# Altium PCB 2MB_RAM_CARD.pcbdoc (part 1 of 2)
Units mil, origin at the board's own origin, x right, y up, seen from the top; angles counter-clockwise.
Board outline 12033.6 x 7458.81 mil, 2 copper layers (Top Layer, Bottom Layer); 77 components, 241 nets, 875 pads, 126 vias.
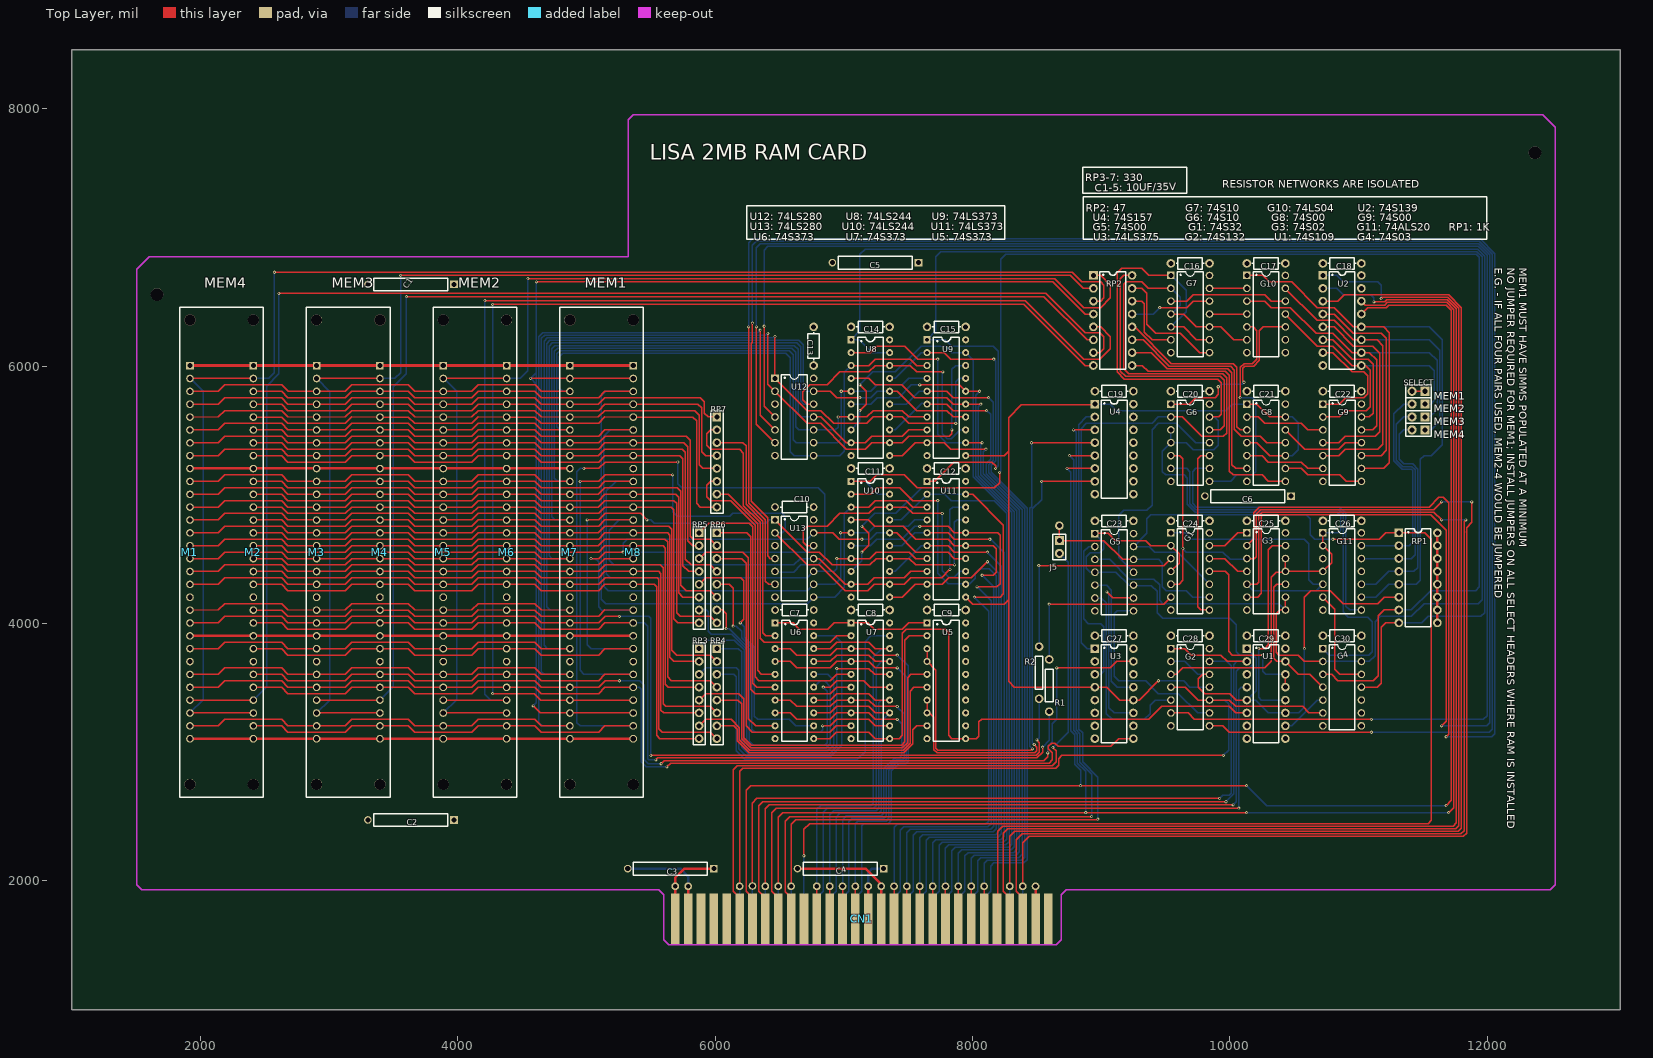
[diagram p0: Top Layer view]
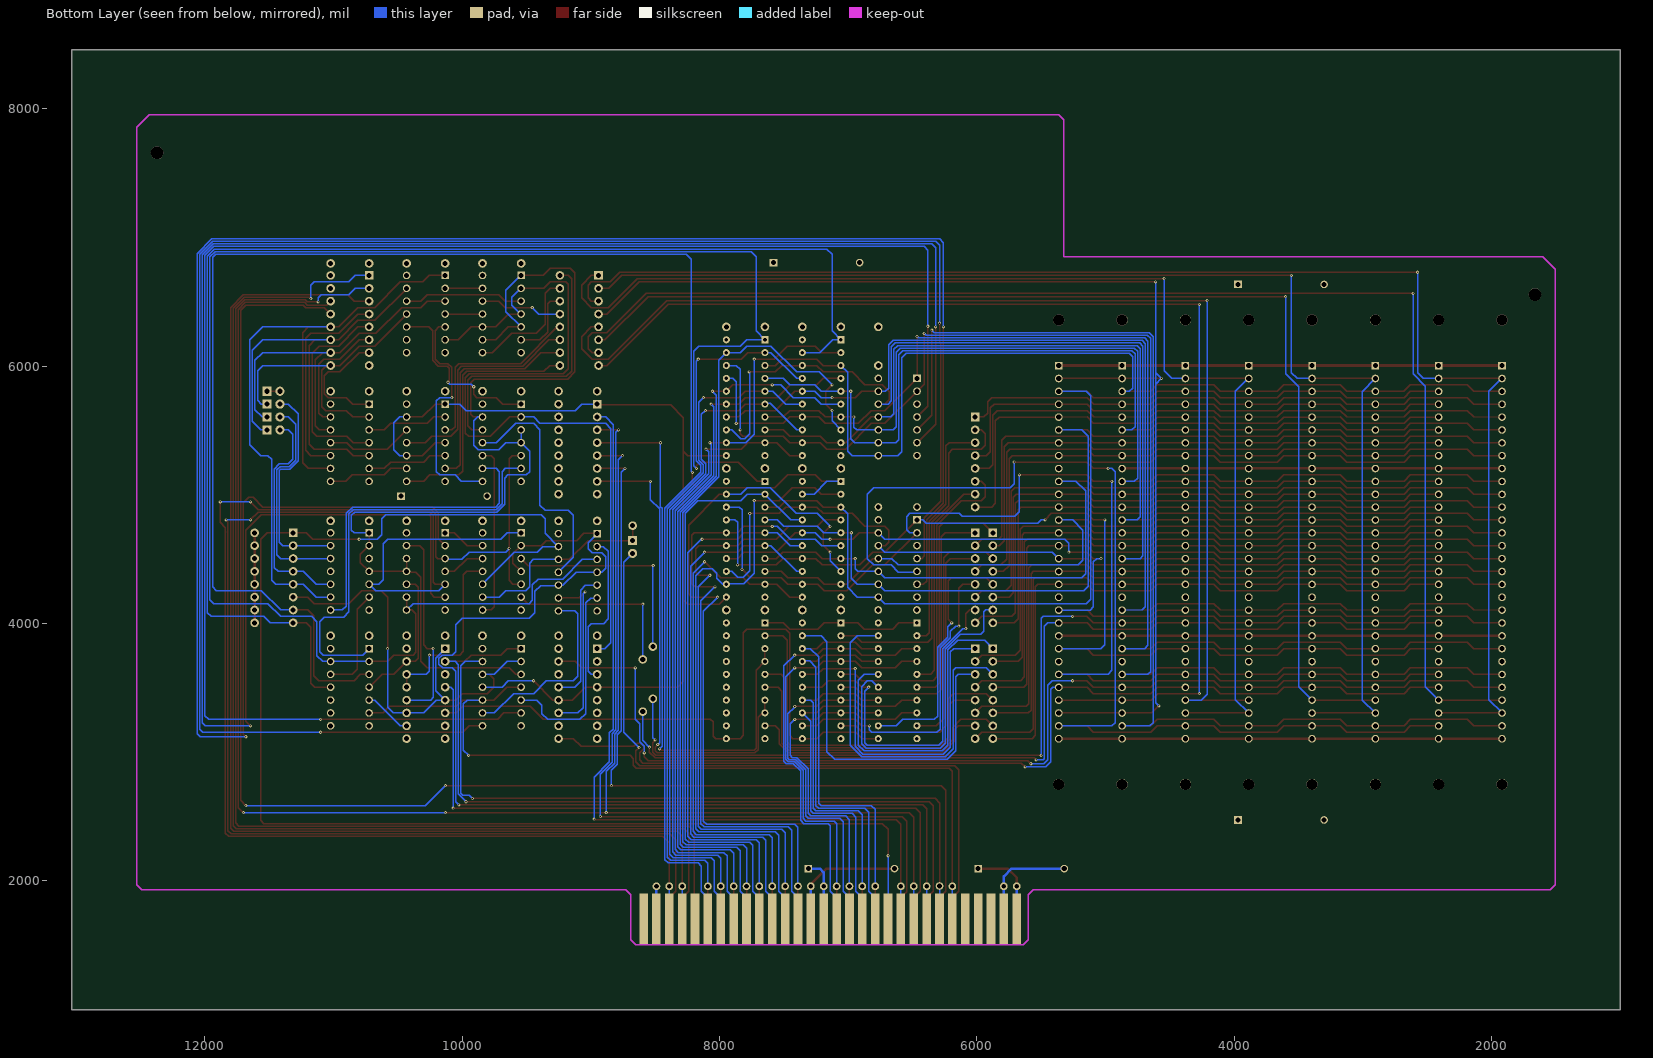
[diagram p1: Bottom Layer view, seen from below]

## Layer stack, top to bottom
Top Layer: signal copper (thickness not stored)
Dielectric: dielectric 12.6, FR-4, Dk 4.8
Bottom Layer: signal copper (thickness not stored)

## Board outline
13033.6,1000 1000,1000 1000,8458.81 13033.6,8458.81

## Components (designator, comment, footprint, x,y, rotation, side; value= is the part's Value field where it differs from the comment)
C1 "10uF" 17MM_NARROW_AXIAL_CAP 3970,6635.19 r180 top
C2 "10uF" 17MM_NARROW_AXIAL_CAP 3970,2473.47 r180 top
C3 "10uF" 17MM_NARROW_AXIAL_CAP 5989.99,2095.2 r180 top
C4 "10uF" 17MM_NARROW_AXIAL_CAP 7309.28,2095.2 r180 top
C5 "10uF" 17MM_NARROW_AXIAL_CAP 7579.99,6805.19 r180 top
C6 "10uF" 17MM_NARROW_AXIAL_CAP 10475,4990.19 r180 top
C7 "100nF" CERAMIC_CAP_LISA#1 6465.62,4105.19 r0 top
C8 "100nF" CERAMIC_CAP_LISA#2 7056.17,4105.19 r0 top
C9 "100nF" CERAMIC_CAP_LISA#2 7646.72,4105.19 r0 top
C10 "100nF" CERAMIC_CAP_LISA#1 6464.99,4905.19 r0 top
C11 "100nF" CERAMIC_CAP_LISA#2 7056.21,5205.19 r0 top
C12 "100nF" CERAMIC_CAP_LISA#2 7646.72,5205.19 r0 top
C13 "100nF" CERAMIC_CAP_LISA#2 6765,6305.19 r270 top
C14 "100nF" CERAMIC_CAP_LISA#2 7056.21,6305.19 r0 top
C15 "100nF" CERAMIC_CAP_LISA#2 7646.72,6305.19 r0 top
C16 "100nF" CERAMIC_CAP_LISA#2 9541.83,6798.3 r0 top
C17 "100nF" CERAMIC_CAP_LISA#2 10131.79,6798.3 r0 top
C18 "100nF" CERAMIC_CAP_LISA#2 10722.3,6798.3 r0 top
C19 "100nF" CERAMIC_CAP_LISA#2 8950.69,5805.23 r0 top
C20 "100nF" CERAMIC_CAP_LISA#2 9541.83,5805.23 r0 top
C21 "100nF" CERAMIC_CAP_LISA#2 10131.79,5805.23 r0 top
C22 "100nF" CERAMIC_CAP_LISA#2 10722.3,5805.23 r0 top
C23 "100nF" CERAMIC_CAP_LISA#2 8950.69,4798.3 r0 top
C24 "100nF" CERAMIC_CAP_LISA#2 9541.83,4798.3 r0 top
C25 "100nF" CERAMIC_CAP_LISA#2 10131.79,4798.3 r0 top
C26 "100nF" CERAMIC_CAP_LISA#2 10722.3,4798.3 r0 top
C27 "100nF" CERAMIC_CAP_LISA#2 8950.69,3905.24 r0 top
C28 "100nF" CERAMIC_CAP_LISA#2 9541.83,3905.24 r0 top
C29 "100nF" CERAMIC_CAP_LISA#2 10131.79,3905.24 r0 top
C30 "100nF" CERAMIC_CAP_LISA#2 10722.3,3905.24 r0 top
CN1 "EDGE CONNECTOR" "LISA RAM EDGE CONNECTOR" 7139.99,1705.19 r0 top
G1 "74S32 (LISA)" DIP-14_L19.4-W6.4-P2.54-LS7.6-BL 9691.2,4405.19 r270 top
G2 "74LS132 (LISA)" DIP-14_L19.2-W6.6-P2.54-LS10.9-BL 9691.8,3505.2 r270 top
G3 "74LS00 (LISA)" DIP14 10281.8,4412.1 r270 top
G4 "74LS03" DIP-14_L19.2-W6.6-P2.54-LS10.9-BL 10872.3,3505.2 r270 top
G5 "74LS00 (LISA)" DIP14 9100.7,4405.19 r270 top
G6 "74LS10 (LISA)" DIP14 9691.2,5412.1 r270 top
G7 "74LS10 (LISA)" DIP14 9691.2,6412.1 r270 top
G8 "74LS02 (LISA)" DIP-14_L19.4-W6.4-P2.54-LS7.6-BL 10281.8,5405.19 r270 top
G9 "74LS00" DIP14 10872.3,5412.1 r270 top
G10 "74LS04" DIP-14_L19.4-W6.4-P2.54-LS7.6-BL 10281.8,6405.19 r270 top
G11 "74ALS20" DIP-14_L19.4-W6.4-P2.54-LS7.6-BL 10872.3,4405.19 r270 top
J5 "JUMPER2" HDR-TH_2P-P2.54-V-M-1 8675,4595.19 r270 top
M1 "SIMM-30" SIMM30_NO_SILK 1918.4,4554.99 r0 top
M2 "SIMM-30" SIMM30_NO_SILK 2410.5,4554.99 r0 top
M3 "SIMM-30" SIMM30_NO_SILK 2902.6,4554.99 r0 top
M4 "SIMM-30" SIMM30_NO_SILK 3394.8,4554.99 r0 top
M5 "SIMM-30" SIMM30_NO_SILK 3886.9,4554.99 r0 top
M6 "SIMM-30" SIMM30_NO_SILK 4379,4554.99 r0 top
M7 "SIMM-30" SIMM30_NO_SILK 4871.1,4554.99 r0 top
M8 "SIMM-30" SIMM30_NO_SILK 5363.3,4554.99 r0 top
MEM1 "MEM1" HDR-TH_2P-P2.54-V-M-1 11466,5805.19 r180 top
MEM2 "MEM2" HDR-TH_2P-P2.54-V-M-1 11466,5705.19 r180 top
MEM3 "MEM3" HDR-TH_2P-P2.54-V-M-1 11466,5605.19 r180 top
MEM4 "MEM4" HDR-TH_2P-P2.54-V-M-1 11466,5505.19 r180 top
R1 "33" NARROW_RESISTOR 8517.55,3610.23 r180 top
R2 "33" NARROW_RESISTOR 8596.29,3510.23 r180 top
RP1 "1K RES_PACK" DIP-16_L19.7-W6.6-P2.54-LS7.6-BL 11462.91,4355.23 r270 top
RP2 "47OHM_RES_PACK" DIP-16_L19.7-W6.6-P2.54-LS7.6-BL 9090.01,6355.23 r270 top
RP3 "33 Ohm Resistor Network" RES_PACK_LINE 5875.11,3455.23 r270 top
RP4 "33 Ohm Resistor Network" RES_PACK_LINE 6012.91,3455.23 r270 top
RP5 "33 Ohm Resistor Network" RES_PACK_LINE 5875.11,4355.23 r270 top
RP6 "33 Ohm Resistor Network" RES_PACK_LINE 6012.91,4355.23 r270 top
RP7 "33 Ohm Resistor Network" RES_PACK_LINE 6012.91,5255.23 r270 top
U1 "74S109 (LISA)" DIP-16_L19.7-W6.6-P2.54-LS7.6-BL 10281.81,3455.23 r270 top
U2 "74LS139" DIP-16_L19.7-W6.6-P2.54-LS7.6-BL 10872.31,6355.23 r270 top
U3 "74LS375 (LISA)" DIP-16_L19.7-W6.6-P2.54-LS7.6-BL 9100.61,3455.23 r270 top
U4 "74LS157 (LISA)" DIP-16_L19.7-W6.6-P2.54-LS7.6-BL 9100.71,5355.23 r270 top
U5 "74LS373" DIP20_LISA 7796.7,3555.2 r270 top
U6 "74LS373" DIP20_LISA 6615.6,3555.2 r270 top
U7 "74LS373" DIP20_LISA 7206.2,3555.2 r270 top
U8 "74LS244" DIP20_LISA 7206.2,5755.19 r270 top
U9 "74LS373" DIP20_LISA 7796.7,5755.19 r270 top
U10 "74LS244" DIP20_LISA 7206.2,4655.19 r270 top
U11 "74LS373" DIP20_LISA 7796.7,4655.19 r270 top
U12 "74LS280" DIP-14_L19.4-W6.4-P2.54-LS7.6-BL 6615,5605.19 r270 top
U13 "74LS280" DIP-14_L19.4-W6.4-P2.54-LS7.6-BL 6615,4505.19 r270 top

## Footprints (in the part's own frame and the unit in brackets; to place one, negate y for a bottom-side part, rotate by r counter-clockwise, add the part's x,y. Pads: shape width x height; smd on the part's side, far side on the other; paste and mask are expansions set on the pad)
17MM_NARROW_AXIAL_CAP [mm]
  rect 1.5x1.5 hole 1 paste+0 mask+0.051: 1(0,0)
  round 1.5 hole 1 paste+0 mask+0.051: 2(17,0)
  silkscreen extent 1.27,-1.27 15.88,1.27
CERAMIC_CAP_LISA#1 [mil]
  round 60 hole 36 paste+0 mask+2: 1(0,0) 2(300,0)
  silkscreen extent 40,-45 260,45
CERAMIC_CAP_LISA#2 [mil]
  round 66.93 hole 39.37 paste+0 mask+2: 1(0,0) 2(300,0)
  silkscreen extent 40,-45 260,45
DIP14 [mm]
  rect 1.5x1.5 hole 1 paste+0 mask+0.051: 1(-7.445,-3.794)
  round 1.5 hole 1 paste+0 mask+0.051: 2(-4.905,-3.794) 3(-2.365,-3.794) 4(0.175,-3.794) 5(2.715,-3.794) 6(5.255,-3.794) 7(7.795,-3.794) 8(7.795,3.826) 9(5.255,3.826) 10(2.715,3.826) 11(0.175,3.826) 12(-2.365,3.826) 13(-4.905,3.826) 14(-7.445,3.826)
  silkscreen extent -8.21,-2.52 8.56,2.56
DIP20_LISA [mil]
  rect 55x55 hole 28 paste+0 mask+2: 1(-450,-150)
  round 55 hole 28 paste+0 mask+2: 2(-350,-150) 3(-250,-150) 4(-150,-150) 5(-50,-150) 6(50,-150) 7(150,-150) 8(250,-150) 9(350,-150) 10(450,-150) 11(450,150) 12(350,150) 13(250,150) 14(150,150) 15(50,150) 16(-50,150) 17(-150,150) 18(-250,150) 19(-350,150) 20(-450,150)
  silkscreen extent -470,-100 470,100
DIP-14_L19.2-W6.6-P2.54-LS10.9-BL [mm]
  rect 1.5x1.5 hole 1 paste+0 mask+0.051: 1(-7.62,-3.81)
  round 1.5 hole 1 paste+0 mask+0.051: 2(-5.08,-3.81) 3(-2.54,-3.81) 4(0,-3.81) 5(2.54,-3.81) 6(5.08,-3.81) 7(7.62,-3.81) 8(7.62,3.81) 9(5.08,3.81) 10(2.54,3.81) 11(0,3.81) 12(-2.54,3.81) 13(-5.08,3.81) 14(-7.62,3.81)
  silkscreen extent -8.38,-2.54 8.38,2.54
DIP-14_L19.4-W6.4-P2.54-LS7.6-BL [mm]
  rect 1.5x1.5 hole 1 paste+0 mask+0.051: 1(-7.62,-3.81)
  round 1.5 hole 1 paste+0 mask+0.051: 2(-5.08,-3.81) 3(-2.54,-3.81) 4(0,-3.81) 5(2.54,-3.81) 6(5.08,-3.81) 7(7.62,-3.81) 8(7.62,3.81) 9(5.08,3.81) 10(2.54,3.81) 11(0,3.81) 12(-2.54,3.81) 13(-5.08,3.81) 14(-7.62,3.81)
  silkscreen extent -8.38,-2.54 8.38,2.54
DIP-16_L19.7-W6.6-P2.54-LS7.6-BL [mm]
  rect 1.7x1.7 hole 1 paste+0 mask+0.051: 1(-8.89,-3.81)
  round 1.7 hole 1 paste+0 mask+0.051: 2(-6.35,-3.81) 3(-3.81,-3.81) 4(-1.27,-3.81) 5(1.27,-3.81) 6(3.81,-3.81) 7(6.35,-3.81) 8(8.89,-3.81) 9(8.89,3.81) 10(6.35,3.81) 11(3.81,3.81) 12(1.27,3.81) 13(-1.27,3.81) 14(-3.81,3.81) 15(-6.35,3.81) 16(-8.89,3.81)
  silkscreen extent -9.65,-2.54 9.65,2.54
HDR-TH_2P-P2.54-V-M-1 [mm]
  rect 1.8x1.8 hole 1 paste+0 mask+0.051: 1(-1.27,0)
  round 1.8 hole 1 paste+0 mask+0.051: 2(1.27,0)
  silkscreen extent -2.54,-1.27 2.54,1.27
"LISA RAM EDGE CONNECTOR" [mil]
  rect 66.93x390 smd far side paste+0 mask+2.01: 1(1450,0) 3(1350,0) 5(1250,0) 7(1150,0) 9(1050,0) 11(950,0) 13(850,0) 15(750,0) 17(650,0) 19(550,0) 21(450,0) 23(350,0) 25(250,0) 27(150,0) 29(50,0) 31(-50,0) 33(-150,0) 35(-250,0) 37(-350,0) 39(-450,0) 41(-550,0) 43(-650,0) 45(-750,0) 47(-850,0) 49(-950,0) 51(-1050,0) 53(-1150,0) 55(-1250,0) 57(-1350,0) 59(-1450,0)
  rect 66.93x390 smd paste+0 mask+2.01: 2(1450,0) 4(1350,0) 6(1250,0) 8(1150,0) 10(1050,0) 12(950,0) 14(850,0) 16(750,0) 18(650,0) 20(550,0) 22(450,0) 24(350,0) 26(250,0) 28(150,0) 30(50,0) 32(-50,0) 34(-150,0) 36(-250,0) 38(-350,0) 40(-450,0) 42(-550,0) 44(-650,0) 46(-750,0) 48(-850,0) 50(-950,0) 52(-1050,0) 54(-1150,0) 56(-1250,0) 58(-1350,0) 60(-1450,0)
NARROW_RESISTOR [mm]
  round 1.7 hole 1 paste+0 mask+0.051: 1(0,4.953) 2(0,-5.347)
  silkscreen extent -0.76,-3.43 0.76,3.05
RES_PACK_LINE [mm]
  rect 1.7x1.7 hole 1 paste+0 mask+0.051: 1(-8.89,0)
  round 1.7 hole 1 paste+0 mask+0.051: 2(-6.35,0) 3(-3.81,0) 4(-1.27,0) 5(1.27,0) 6(3.81,0) 7(6.35,0) 8(8.89,0)
  silkscreen extent -10.08,-1.18 10.11,1.23
SIMM30_NO_SILK [mm]
  rect 1.5x1.5 hole 1 paste+0 mask+0.051: 1(0,36.813)
  round 1.5 hole 1 paste+0 mask+0.051: 2(0,34.273) 3(0,31.733) 4(0,29.193) 5(0,26.653) 6(0,24.113) 7(0,21.573) 8(0,19.033) 9(0,16.493) 10(0,13.953) 11(0,11.413) 12(0,8.873) 13(0,6.333) 14(0,3.793) 15(0,1.253) 16(0,-1.287) 17(0,-3.827) 18(0,-6.367) 19(0,-8.907) 20(0,-11.447) 21(0,-13.987) 22(0,-16.527) 23(0,-19.067) 24(0,-21.607) 25(0,-24.147) 26(0,-26.687) 27(0,-29.227) 28(0,-31.767) 29(0,-34.307) 30(0,-36.847)
  round 2.2 hole 2.2 unplated paste+0: ""(0,-45.847) ""(0,45.813)

## Free pads (board coordinates)
  round 60 hole 36 paste+0 mask+2: 7(6290,1960.19) 9(6390,1957.75) 10(6490,1957.75) 11(6590,1957.75) 13(5689.99,1957.75) 13(5789.99,1957.75) 13(6790,1957.75) 13(7289.99,1957.75) 13(8489.99,1957.75) 14(6890,1957.75) 15(6990,1957.75) 16(7090,1957.75) 20(7390,1957.75) 21(7490,1957.75) 22(7590,1957.75) 26(7690,1957.75) 27(7790,1957.75) 28(7890,1957.75) 29(7990,1957.75) 30(8090,1957.75) 32(8290,1957.75) 33(8390,1957.75) 35(7189.99,1957.75) ""(6190,1957.75)
  round 66.93 hole 39.37 paste+0 mask+2: 34(8675,4760.19)
  round 98.43 hole 98.43 unplated paste+0: ""(1662.48,6556.16) ""(12371.12,7658.52)

## Via types
v1: diameter 24, hole 12, Top Layer to Bottom Layer, tented both sides, 126 vias

## Nets (pads, with @x,y where several pads share a name; then routed paths per layer and width w, separated by ;. In a path a pad name is that pad's centre, name@x,y a point inside that pad or via, vN(x,y) a via of type N, cw(c..) or ccw(c..) an arc to the next point about the centre after c; other vN are vias at no path point)
+5V: C1.1 C2.1 C3.1 C4.1 C5.1 C6.1 C7.2 C8.2 C9.2 C10.2 C11.2 C12.2 C13.2 C14.2 C15.2 C16.2 C17.2 C18.2 C19.2 C20.2 C21.2 C22.2 C23.2 C24.2 C25.2 C26.2 C27.2 C28.2 C29.2 C30.2 CN1.29 CN1.30 CN1.59 CN1.60 G1.14 G2.14 G3.14 G4.14 G5.14 G6.14 G7.14 G8.14 G9.14 G10.14 G11.14 M1.1 M1.30 M2.1 M2.30 M3.1 M3.30 M4.1 M4.30 M5.1 M5.30 M6.1 M6.30 M7.1 M7.30 M8.1 M8.30 pad.13@5689.99,1957.75 pad.35 RP1.9 RP1.10 RP1.11 RP1.12 RP1.13 RP1.14 RP1.15 RP1.16 U1.16 U2.16 U3.16 U4.16 U5.20 U6.20 U7.20 U8.20 U9.20 U10.20 U11.20 U12.14 U13.14 | length 9235.9
  Top Layer w19.68: M1.30@1918.4,3105.2 M8.30@5363.3,3105.2 ; M1.1@1918.4,6005.19 M8.1@5363.3,6005.19 ; CN1.60@5689.99,1705.19 pad.13@5689.99,1957.75 5689.99,2025.19 5760.34,2095.55 C3.1@5989.99,2095.2 ; CN1.30@7189.99,1705.19 pad.35@7189.99,1957.75 ; RP1.9@11612.91,4005.23 RP1.16@11612.91,4705.23
  Bottom Layer w19.68: CN1.59@5689.99,1705.19 pad.13@5689.99,1957.75 ; CN1.29@7189.99,1705.19 pad.35@7189.99,1957.75 7189.99,2065.18 7220,2095.2 C4.1@7309.28,2095.2
/CAS0: M7.2 M7.28 M8.2 M8.28 RP2.4 | length 9466
  Top Layer w10: v1(4565,5905.19) M7.2@4871.1,5904.99 ; v1(4585,3360.2) 4640,3305.2 M7.28@4871.1,3304.99 ; v1(4610,6655.19) 8625,6655.19 8875,6405.19 8895.45,6405.19 ; M7.28@4871.14,3304.99 M8.28@5363.26,3304.99 ; M7.2@4871.14,5904.99 M8.2@5363.26,5904.99 ; 8895.4,6405.19 RP2.4@8940.01,6405.23
  Bottom Layer w10: v1(4585,3360.2) 4610,3385.2 4610,5915.19 v1(4610,6655.19) ; 4610,5860.1 v1(4565,5905.19) 4610,5950.9
/CAS1: M5.2 M5.28 M6.2 M6.28 RP2.1 | length 9487.8
  Top Layer w10: M5.28@3886.88,3304.99 M6.28@4379.01,3304.99 ; M5.2@3886.88,5904.99 M6.2@4379.01,5904.99 ; v1(4545,6680.19) 8640,6680.19 8865,6455.19 8995,6455.19 9070,6530.19 9070,6630.19 8994.96,6705.23 RP2.1@8940.01,6705.23
  Bottom Layer w10: M5.28@3886.88,3304.99 3990,3408.11 3990,5805.19 3890.2,5904.99 M5.2@3886.88,5904.99 ; M6.2@4379,5904.99 4485,5905.19 4545,5965.19 v1(4545,6680.19)
/CAS2: M3.2 M3.28 M4.2 M4.28 RP2.2 | length 10035.7
  Top Layer w10: M3.28@2902.63,3304.99 M4.28@3394.76,3304.99 ; M3.2@2902.63,5904.99 M4.2@3394.76,5904.99 ; v1(3555,6705.19) 8760,6705.19 8860,6605.19 RP2.2@8940.01,6605.23
  Bottom Layer w10: M3.28@2902.63,3304.99 2904.8,3304.99 3005,3405.2 3005,5802.62 M3.2@2902.63,5904.99 ; M4.28@3394.76,3304.99 M4.28@3399.8,3304.99 ; M4.2@3394.76,5904.99 3510,5905.19 3555,5950.19 v1(3555,6705.19)
/CAS3: M1.2 M1.28 M2.2 M2.28 RP2.3 | length 11309.5
  Top Layer w10: M1.28@1918.38,3304.99 M2.28@2410.51,3304.99 ; M1.2@1918.38,5904.99 M2.2@2410.51,5904.99 ; v1(2575,6730.19) 8775,6730.19 8850,6655.19 8995,6655.19 9020,6630.19 9020,6575.19 9020,6530.19 8995,6505.19 RP2.3@8940.01,6505.23
  Bottom Layer w10: M1.28@1918.38,3304.99 2020,3406.61 2020,5805.19 1920.2,5904.99 M1.2@1918.38,5904.99 ; M2.2@2410.51,5904.99 2529.8,5904.99 2575,5950.19 v1(2575,6730.19)
/RAS0: M7.27 M8.27 RP2.8 | length 9005.8
  Top Layer w10: v1(4270,3455.2) 4595,3455.2 4645.2,3404.99 M7.27@4871.1,3404.99 ; v1(4270,6480.19) 8400,6480.19 8875,6005.19 RP2.8@8940.01,6005.23 ; M7.27@4871.14,3404.99 M8.27@5363.26,3404.99
  Bottom Layer w10: v1(4270,3455.2) v1(4270,6480.19)
/RAS1: M5.27 M6.27 RP2.5 | length 9077.4
  Top Layer w10: M5.27@3886.88,3404.99 M6.27@4379.01,3404.99 ; v1(4210,6510.19) 8410,6510.19 8865,6055.19 8990,6055.19 9070,6135.19 9070,6230.19 8995,6305.19 RP2.5@8940.01,6305.23
  Bottom Layer w10: v1(4210,6510.19) 4210,3450.2 4255,3405.2 M6.27@4379,3404.99
/RAS2: M3.27 M4.27 RP2.6 | length 9191.1
  Top Layer w10: M3.27@2902.63,3404.99 M4.27@3394.76,3404.99 ; v1(3600,6540.19) 8555,6540.19 8890,6205.19 RP2.6@8940.01,6205.23
  Bottom Layer w10: M4.27@3394.8,3404.99 3500,3510.2 3500,3540.2 3500,5840.19 3600,5940.19 v1(3600,6540.19)
/RAS3: M1.27 M2.27 RP2.7 | length 10470.9
  Top Layer w10: M1.27@1918.38,3404.99 M2.27@2410.51,3404.99 ; v1(2610,6565.19) 3140,6565.19 8570,6565.19 8875,6260.19 8990,6260.19 9020,6230.19 9020,6135.19 8990,6105.19 RP2.7@8940.01,6105.23
  Bottom Layer w10: M2.27@2410.5,3404.99 2515,3510.2 2515,5845.19 2610,5940.19 v1(2610,6565.19)
/WEL: M2.21 M4.21 M6.21 M8.21 R2.1 | length 7664.2
  Top Layer w10: M2.21@2410.48,4004.99 2630.18,4004.99 2679.98,3955.19 3124.98,3955.19 3174.98,4005.19 M4.21@3394.78,4004.99 ; M4.21@3394.73,4004.99 3614.43,4004.99 3664.23,3955.19 4109.23,3955.19 4159.23,4005.19 M6.21@4379.03,4004.99 ; M6.21@4378.98,4004.99 4598.68,4004.99 4648.48,3955.19 5093.48,3955.19 5143.48,4005.19 M8.21@5363.28,4004.99 ; v1(5540,2940.2) 5555,2955.2 8500,2955.2 8545,3000.2 v1(8545,3040.2)
  Bottom Layer w10: M8.21@5363.3,4004.99 5450.2,4004.99 5475,3980.2 5475,2950.2 5485,2940.2 v1(5540,2940.2) ; v1(8545,3040.2) 8596.29,3091.49 R2.1@8596.29,3315.24
/WEU: M1.21 M3.21 M5.21 M7.21 R1.1 | length 8258.6
  Top Layer w10: M1.21@1918.38,4004.99 2139.98,4005.19 2189.98,4055.19 2629.98,4055.19 2679.98,4005.19 M3.21@2902.58,4004.99 ; M3.21@2902.63,4004.99 3124.23,4005.19 3174.23,4055.19 3614.23,4055.19 3664.23,4005.19 M5.21@3886.83,4004.99 ; M5.21@3886.88,4004.99 4108.48,4005.19 4158.48,4055.19 4598.48,4055.19 4648.48,4005.19 4871.08,4004.99 5095,4005.2 5145,4055.2 v1(5255,4055.2) ; v1(5500,2975.2) 8495,2975.2 8520,3000.2 8520,3075.2 v1(8500,3095.2)
  Bottom Layer w10: v1(5255,4055.2) 5485,4055.2 5500,4040.2 v1(5500,2975.2) ; v1(8500,3095.2) 8517.55,3112.74 R1.1@8517.55,3415.22
A0L: M2.4 M4.4 M6.4 M8.4 RP7.4 | length 4091.3
  Top Layer w10: M2.4@2410.5,5704.99 2630.2,5704.99 2680,5655.19 3125,5655.19 3175,5705.19 M4.4@3394.8,5704.99 ; M4.4@3394.73,5704.99 3614.43,5704.99 3664.23,5655.19 4109.23,5655.19 4159.23,5705.19 M6.4@4379.03,5704.99 ; M6.4@4378.98,5704.99 4598.68,5704.99 4648.48,5655.19 5093.48,5655.19 5143.48,5705.19 5363.28,5704.99 5865.2,5704.99 5895,5675.19 5895,5335.19 5925,5305.19 RP7.4@6012.91,5305.23
A0U: M1.4 M3.4 M5.4 M7.4 RP7.1 | length 4354.2
  Top Layer w10: M1.4@1918.4,5704.99 2140,5705.19 2190,5755.19 2630,5755.19 2680,5705.19 M3.4@2902.6,5704.99 ; M3.4@2902.63,5704.99 3124.23,5705.19 3174.23,5755.19 3614.23,5755.19 3664.23,5705.19 M5.4@3886.83,5704.99 ; M5.4@3886.88,5704.99 4108.48,5705.19 4158.48,5755.19 4598.48,5755.19 4648.48,5705.19 M7.4@4871.08,5704.99 ; M7.4@4871.14,5704.99 5092.74,5705.19 5142.74,5755.19 5582.74,5755.19 ; 5582.7,5755.19 5885,5755.19 5915,5725.19 5915,5635.19 5945,5605.19 RP7.1@6012.91,5605.23
A1L: M2.5 M4.5 M6.5 M8.5 RP7.8 | length 4391.3
  Top Layer w10: M2.5@2410.5,5604.99 2630.2,5604.99 2680,5555.19 3125,5555.19 3175,5605.19 M4.5@3394.8,5604.99 ; M4.5@3394.73,5604.99 3614.43,5604.99 3664.23,5555.19 4109.23,5555.19 4159.23,5605.19 M6.5@4379.03,5604.99 ; M6.5@4378.98,5604.99 4598.68,5604.99 4648.48,5555.19 5093.48,5555.19 5143.48,5605.19 5363.28,5604.99 5825.2,5604.99 5855,5575.19 5855,4935.19 5885,4905.19 RP7.8@6012.91,4905.23
A1U: M1.5 M3.5 M5.5 M7.5 RP7.5 | length 4651.3
  Top Layer w10: M1.5@1918.4,5604.99 2140,5605.19 2190,5655.19 2630,5655.19 2680,5605.19 M3.5@2902.6,5604.99 ; M3.5@2902.63,5604.99 3124.23,5605.19 3174.23,5655.19 3614.23,5655.19 3664.23,5605.19 M5.5@3886.83,5604.99 ; M5.5@3886.88,5604.99 4108.48,5605.19 4158.48,5655.19 4598.48,5655.19 4648.48,5605.19 M7.5@4871.08,5604.99 ; M7.5@4871.14,5604.99 5092.74,5605.19 5142.74,5655.19 5582.74,5655.19 ; 5582.7,5655.19 5840,5655.19 5875,5620.19 5875,5235.19 5905,5205.19 RP7.5@6012.91,5205.23
A2L: M2.7 M4.7 M6.7 M8.7 RP5.2 | length 4347.6
  Top Layer w10: M2.7@2410.5,5404.99 2630.2,5404.99 2680,5355.19 3125,5355.19 3175,5405.19 M4.7@3394.8,5404.99 ; M4.7@3394.73,5404.99 3614.43,5404.99 3664.23,5355.19 4109.23,5355.19 4159.23,5405.19 M6.7@4379.03,5404.99 ; M6.7@4378.98,5404.99 4598.68,5404.99 4648.48,5355.19 5093.48,5355.19 5143.48,5405.19 5363.28,5404.99 5755.2,5404.99 5785,5375.19 5785,4645.19 5825,4605.19 RP5.2@5875.11,4605.23
A2U: M1.7 M3.7 M5.7 M7.7 RP6.2 | length 5027.9
  Top Layer w10: M1.7@1918.4,5404.99 2140,5405.19 2190,5455.19 2630,5455.19 2680,5405.19 M3.7@2902.6,5404.99 ; M3.7@2902.63,5404.99 3124.23,5405.19 3174.23,5455.19 3614.23,5455.19 3664.23,5405.19 M5.7@3886.83,5404.99 ; M5.7@3886.88,5404.99 4108.48,5405.19 4158.48,5455.19 4598.48,5455.19 4648.48,5405.19 4871.08,5404.99 5095,5405.19 5145,5455.19 5775,5455.19 5805,5425.19 5805,4680.19 5830,4655.19 5962.95,4655.19 RP6.2@6012.91,4605.23
A3L: M2.8 M4.8 M6.8 M8.8 RP5.4 | length 4447.6
  Top Layer w10: M2.8@2410.5,5304.99 2630.2,5304.99 2680,5255.19 3125,5255.19 3175,5305.19 M4.8@3394.8,5304.99 ; M4.8@3394.73,5304.99 3614.43,5304.99 3664.23,5255.19 4109.23,5255.19 4159.23,5305.19 M6.8@4379.03,5304.99 ; M6.8@4378.98,5304.99 4598.68,5304.99 4648.48,5255.19 5093.48,5255.19 5143.48,5305.19 5363.28,5304.99 5725.2,5304.99 5750,5280.19 5750,4450.19 5795,4405.19 RP5.4@5875.11,4405.23
A3U: M1.8 M3.8 M5.8 M7.8 RP6.4 | length 5119.1
  Top Layer w10: M1.8@1918.4,5304.99 2140,5305.19 2190,5355.19 2630,5355.19 2680,5305.19 M3.8@2902.6,5304.99 ; M3.8@2902.63,5304.99 3124.23,5305.19 3174.23,5355.19 3614.23,5355.19 3664.23,5305.19 M5.8@3886.83,5304.99 ; M5.8@3886.88,5304.99 4108.48,5305.19 4158.48,5355.19 4598.48,5355.19 4648.48,5305.19 4871.08,5304.99 5090,5305.19 5140,5355.19 5745,5355.19 5768.93,5331.27 5768.93,4501.27 5815,4455.19 5962.95,4455.19 RP6.4@6012.91,4405.23
A4L: M2.11 M4.11 M6.11 M8.11 RP5.6 | length 4356.4
  Top Layer w10: M2.11@2410.48,5004.99 2630.18,5004.99 2679.98,4955.19 3124.98,4955.19 3174.98,5005.19 M4.11@3394.78,5004.99 ; M4.11@3394.73,5004.99 3614.43,5004.99 3664.23,4955.19 4109.23,4955.19 4159.23,5005.19 M6.11@4379.03,5004.99 ; M6.11@4378.98,5004.99 4598.68,5004.99 4648.48,4955.19 5093.48,4955.19 5143.48,5005.19 5363.28,5004.99 5695.2,5004.99 5717.8,4982.4 5717.8,4237.4 5750,4205.19 RP5.6@5875.11,4205.23
A4U: M1.11 M3.11 M5.11 M7.11 RP6.6 | length 5019.1
  Top Layer w10: M1.11@1918.38,5004.99 2139.98,5005.19 2189.98,5055.19 2629.98,5055.19 2679.98,5005.19 M3.11@2902.58,5004.99 ; M3.11@2902.63,5004.99 3124.23,5005.19 3174.23,5055.19 3614.23,5055.19 3664.23,5005.19 M5.11@3886.83,5004.99 ; M5.11@3886.88,5004.99 4108.48,5005.19 4158.48,5055.19 4598.48,5055.19 4648.48,5005.19 4871.08,5004.99 5090,5005.19 5140,5055.19 5705,5055.19 5733.9,5026.3 5733.9,4296.3 5775,4255.19 5962.9,4255.19 RP6.6@6012.91,4205.23
A5L: M2.12 M4.12 M6.12 M8.12 RP5.8 | length 4459.3
  Top Layer w10: M2.12@2410.48,4904.99 2630.18,4904.99 2679.98,4855.19 3124.98,4855.19 3174.98,4905.19 M4.12@3394.78,4904.99 ; M4.12@3394.73,4904.99 3614.43,4904.99 3664.23,4855.19 4109.23,4855.19 4159.23,4905.19 M6.12@4379.03,4904.99 ; M6.12@4378.98,4904.99 4598.68,4904.99 4648.48,4855.19 5093.48,4855.19 5143.48,4905.19 5363.28,4904.99 5660.2,4904.99 5680,4885.19 5680,4035.2 5710,4005.2 RP5.8@5875.11,4005.23
A5U: M1.12 M3.12 M5.12 M7.12 RP6.8 | length 5130.8
  Top Layer w10: M1.12@1918.38,4904.99 2139.98,4905.19 2189.98,4955.19 2629.98,4955.19 2679.98,4905.19 M3.12@2902.58,4904.99 ; M3.12@2902.63,4904.99 3124.23,4905.19 3174.23,4955.19 3614.23,4955.19 3664.23,4905.19 M5.12@3886.83,4904.99 ; M5.12@3886.88,4904.99 4108.48,4905.19 4158.48,4955.19 4598.48,4955.19 4648.48,4905.19 4871.08,4904.99 5090,4905.19 5140,4955.19 5680,4955.19 5700,4935.19 5700,4085.2 5730,4055.2 5962.9,4055.2 RP6.8@6012.91,4005.23
A6L: M2.14 M4.14 M6.14 M8.14 RP3.2 | length 4559.3
  Top Layer w10: M2.14@2410.48,4704.99 2630.18,4704.99 2679.98,4655.19 3124.98,4655.19 3174.98,4705.19 M4.14@3394.78,4704.99 ; M4.14@3394.73,4704.99 3614.43,4704.99 3664.23,4655.19 4109.23,4655.19 4159.23,4705.19 M6.14@4379.03,4704.99 ; M6.14@4378.98,4704.99 4598.68,4704.99 4648.48,4655.19 5093.48,4655.19 5143.48,4705.19 5363.28,4704.99 5630.2,4704.99 5647.8,4687.4 5647.8,3737.39 5680,3705.2 RP3.2@5875.11,3705.23
A6U: M1.14 M3.14 M5.14 M7.14 RP4.2 | length 5224.9
  Top Layer w10: M1.14@1918.38,4704.99 2139.98,4705.19 2189.98,4755.19 2629.98,4755.19 2679.98,4705.19 M3.14@2902.58,4704.99 ; M3.14@2902.63,4704.99 3124.23,4705.19 3174.23,4755.19 3614.23,4755.19 3664.23,4705.19 M5.14@3886.83,4704.99 ; M5.14@3886.88,4704.99 4108.48,4705.19 4158.48,4755.19 4598.48,4755.19 4648.48,4705.19 4871.08,4704.99 5090,4705.19 5140,4755.19 5640,4755.19 5663.9,4731.3 5663.9,3791.3 5700,3755.2 5962.9,3755.2 RP4.2@6012.91,3705.23
A7L: M2.15 M4.15 M6.15 M8.15 RP3.4 | length 4665.2
  Top Layer w10: M2.15@2410.48,4604.99 2630.18,4604.99 2679.98,4555.19 3124.98,4555.19 3174.98,4605.19 M4.15@3394.78,4604.99 ; M4.15@3394.73,4604.99 3614.43,4604.99 3664.23,4555.19 4109.23,4555.19 4159.23,4605.19 M6.15@4379.03,4604.99 ; M6.15@4378.98,4604.99 4598.68,4604.99 4648.48,4555.19 5093.48,4555.19 5143.48,4605.19 5363.28,4604.99 5595.2,4604.99 5613.9,4586.3 5613.9,3526.3 5635,3505.2 RP3.4@5875.11,3505.23
A7U: M1.15 M3.15 M5.15 M7.15 RP4.4 | length 5330.8
  Top Layer w10: M1.15@1918.38,4604.99 2139.98,4605.19 2189.98,4655.19 2629.98,4655.19 2679.98,4605.19 M3.15@2902.58,4604.99 ; M3.15@2902.63,4604.99 3124.23,4605.19 3174.23,4655.19 3614.23,4655.19 3664.23,4605.19 M5.15@3886.83,4604.99 ; M5.15@3886.88,4604.99 4108.48,4605.19 4158.48,4655.19 4598.48,4655.19 4648.48,4605.19 4871.08,4604.99 5090,4605.19 5140,4655.19 5610,4655.19 5630,4635.19 5630,3585.2 5660,3555.2 5962.9,3555.2 RP4.4@6012.91,3505.23
A8L: M2.17 M4.17 M6.17 M8.17 RP3.6 | length 4665.2
  Top Layer w10: M2.17@2410.48,4404.99 2630.18,4404.99 2679.98,4355.19 3124.98,4355.19 3174.98,4405.19 M4.17@3394.78,4404.99 ; M4.17@3394.73,4404.99 3614.43,4404.99 3664.23,4355.19 4109.23,4355.19 4159.23,4405.19 M6.17@4379.03,4404.99 ; M6.17@4378.98,4404.99 4598.68,4404.99 4648.48,4355.19 5093.48,4355.19 5143.48,4405.19 5363.28,4404.99 5560.2,4404.99 5578.9,4386.3 5578.9,3326.3 5600,3305.2 RP3.6@5875.11,3305.23
A8U: M1.17 M3.17 M5.17 M7.17 RP4.6 | length 5336.7
  Top Layer w10: M1.17@1918.38,4404.99 2139.98,4405.19 2189.98,4455.19 2629.98,4455.19 2679.98,4405.19 M3.17@2902.58,4404.99 ; M3.17@2902.63,4404.99 3124.23,4405.19 3174.23,4455.19 3614.23,4455.19 3664.23,4405.19 M5.17@3886.83,4404.99 ; M5.17@3886.88,4404.99 4108.48,4405.19 4158.48,4455.19 4598.48,4455.19 4648.48,4405.19 4871.08,4404.99 5095,4405.19 5145,4455.19 5575,4455.19 5595,4435.19 5595,3375.2 5615,3355.2 5962.9,3355.2 RP4.6@6012.91,3305.23
A9L: M2.18 M4.18 M6.18 M8.18 RP3.8 | length 4762.3
  Top Layer w10: M2.18@2410.48,4304.99 2630.18,4304.99 2679.98,4255.19 3124.98,4255.19 3174.98,4305.19 M4.18@3394.78,4304.99 ; M4.18@3394.73,4304.99 3614.43,4304.99 3664.23,4255.19 4109.23,4255.19 4159.23,4305.19 M6.18@4379.03,4304.99 ; M6.18@4378.98,4304.99 4598.68,4304.99 4648.48,4255.19 5093.48,4255.19 5143.48,4305.19 5363.28,4304.99 5525.2,4304.99 5545,4285.19 5545,3130.2 5570,3105.2 RP3.8@5875.11,3105.23
A9U: M1.18 M3.18 M5.18 M7.18 RP4.8 | length 5436.7
  Top Layer w10: M1.18@1918.38,4304.99 2139.98,4305.19 2189.98,4355.19 2629.98,4355.19 2679.98,4305.19 M3.18@2902.58,4304.99 ; M3.18@2902.63,4304.99 3124.23,4305.19 3174.23,4355.19 3614.23,4355.19 3664.23,4305.19 M5.18@3886.83,4304.99 ; M5.18@3886.88,4304.99 4108.48,4305.19 4158.48,4355.19 4598.48,4355.19 4648.48,4305.19 4871.08,4304.99 5095,4305.19 5145,4355.19 5550,4355.19 5562.8,4342.4 5562.8,3182.39 5590,3155.2 5962.9,3155.2 RP4.8@6012.91,3105.23
D0: M2.3 M4.3 M6.3 M8.3 U10.3 U11.3 U13.8 | length 8154
  Top Layer w10: M2.3@2410.5,5804.99 2630.2,5804.99 2680,5755.19 3125,5755.19 3175,5805.19 M4.3@3394.8,5804.99 ; M4.3@3394.73,5804.99 3614.43,5804.99 3664.23,5755.19 4109.23,5755.19 4159.23,5805.19 M6.3@4379.03,5804.99 ; M6.3@4378.98,5804.99 4598.68,5804.99 4648.48,5755.19 5093.48,5755.19 5143.48,5805.19 M8.3@5363.28,5804.99 ; U10.3@7056.2,4905.19 7195,4905.19 7245,4955.19 7485,4955.19 7535,4905.19 U11.3@7646.7,4905.19
  Bottom Layer w10: M8.3@5363.26,5804.99 5149.8,5804.99 5115,5770.19 5115,4190.19 5150,4155.19 6715,4155.19 U13.8@6765,4205.19 6930,4205.19 7005,4280.19 7005,4853.99 U10.3@7056.2,4905.19
D1: M2.6 M4.6 M6.6 M8.6 U10.5 U11.4 U13.9 | length 7452.8
  Top Layer w10: M2.6@2410.5,5504.99 2630.2,5504.99 2680,5455.19 3125,5455.19 3175,5505.19 M4.6@3394.8,5504.99 ; M4.6@3394.73,5504.99 3614.43,5504.99 3664.23,5455.19 4109.23,5455.19 4159.23,5505.19 M6.6@4379.03,5504.99 ; M6.6@4378.98,5504.99 4598.68,5504.99 4648.48,5455.19 5093.48,5455.19 5143.48,5505.19 M8.6@5363.28,5504.99 ; v1(6975,4705.19) U10.5@7056.2,4705.19
  Bottom Layer w10: M8.6@5363.26,5504.99 5184.8,5504.99 5135,5455.19 5135,4290.19 5170,4255.19 6715,4255.19 U13.9@6765,4305.19 6930,4305.19 6975,4350.19 v1(6975,4705.19) ; U10.5@7056.2,4705.19 7190,4705.19 7240,4755.19 7500,4755.19 7550,4805.19 U11.4@7646.7,4805.19
D2: M2.10 M4.10 M6.10 M8.10 U10.7 U11.7 U13.10 | length 6615.7
  Top Layer w10: M2.10@2410.48,5104.99 2630.18,5104.99 2679.98,5055.19 3124.98,5055.19 3174.98,5105.19 M4.10@3394.78,5104.99 ; M4.10@3394.73,5104.99 3614.43,5104.99 3664.23,5055.19 4109.23,5055.19 4159.23,5105.19 M6.10@4379.03,5104.99 ; M6.10@4378.98,5104.99 4598.68,5104.99 4648.48,5055.19 5093.48,5055.19 5143.48,5105.19 M8.10@5363.28,5104.99 ; v1(6945,4505.19) U10.7@7056.2,4505.19 7200,4505.19 7250,4555.19 7510,4555.19 7560,4505.19 U11.7@7646.7,4505.19
  Bottom Layer w10: M8.10@5363.26,5104.99 5229.8,5104.99 5155,5030.19 5155,4385.19 5185,4355.19 6715,4355.19 U13.10@6765,4405.19 6925,4405.19 6945,4425.19 v1(6945,4505.19)
D3: M2.13 M4.13 M6.13 M8.13 U10.9 U11.8 U13.11 | length 6164.4
  Top Layer w10: M2.13@2410.48,4804.99 2630.18,4804.99 2679.98,4755.19 3124.98,4755.19 3174.98,4805.19 M4.13@3394.78,4804.99 ; M4.13@3394.73,4804.99 3614.43,4804.99 3664.23,4755.19 4109.23,4755.19 4159.23,4805.19 M6.13@4379.03,4804.99 ; M6.13@4378.98,4804.99 4598.68,4804.99 4648.48,4755.19 5093.48,4755.19 5143.48,4805.19 M8.13@5363.28,4804.99 ; U13.11@6765,4505.19 6810,4505.19 7010,4305.19 U10.9@7056.2,4305.19 7185,4305.19 7235,4355.19 7470,4355.19 7520,4405.19 U11.8@7646.7,4405.19
  Bottom Layer w10: M8.13@5363.3,4804.99 5254.8,4804.99 5175,4725.19 5175,4490.19 5210,4455.19 6610,4455.19 6660,4505.19 U13.11@6765,4505.19
D4: M2.16 M4.16 M6.16 M8.16 U10.18 U11.13 U13.12 | length 6546.8
  Top Layer w10: M2.16@2410.48,4504.99 2630.18,4504.99 2679.98,4455.19 3124.98,4455.19 3174.98,4505.19 M4.16@3394.78,4504.99 ; M4.16@3394.73,4504.99 3614.43,4504.99 3664.23,4455.19 4109.23,4455.19 4159.23,4505.19 M6.16@4379.03,4504.99 ; M6.16@4378.98,4504.99 4598.68,4504.99 4648.48,4455.19 5093.48,4455.19 5143.48,4505.19 M8.16@5363.28,4504.99 ; U13.12@6765,4605.19 6710,4605.19 6685,4630.19 6685,4725.19 6715,4755.19 6869.28,4755.19 6969.28,4855.19 7195,4855.19 7245,4905.19 U10.18@7356.2,4905.19 7485,4905.19 7535,4855.19 v1(7765,4855.19)
  Bottom Layer w10: M8.16@5363.26,4504.99 5413.46,4555.19 6715,4555.19 U13.12@6765,4605.19 ; v1(7765,4855.19) 7765,4832.1 7765,4410.19 7815,4360.19 7860,4360.19 7905,4405.19 U11.13@7946.7,4405.19
D5: M2.20 M4.20 M6.20 M8.20 U10.16 U11.14 U13.13 | length 6935.8
  Top Layer w10: M2.20@2410.48,4104.99 2630.18,4104.99 2679.98,4055.19 3124.98,4055.19 3174.98,4105.19 M4.20@3394.78,4104.99 ; M4.20@3394.73,4104.99 3614.43,4104.99 3664.23,4055.19 4109.23,4055.19 4159.23,4105.19 M6.20@4379.03,4104.99 ; M6.20@4378.98,4104.99 4598.68,4104.99 4648.48,4055.19 5093.48,4055.19 5143.48,4105.19 M8.20@5363.28,4104.99 ; v1(5035,4505.19) 5095,4505.19 5145,4555.19 v1(5285,4555.19) ; U13.13@6765,4705.19 6915,4705.19 6965,4655.19 v1(7140,4655.19) ; U10.16@7356.2,4705.19 7410,4705.19 7560,4555.19 7810,4555.19 7860,4505.19 U11.14@7946.7,4505.19
  Bottom Layer w10: v1(5035,4505.19) 5070,4505.19 5095,4480.19 5095,4130.19 5120.2,4104.99 M8.20@5363.26,4104.99 ; v1(5285,4555.19) 5285,4625.19 5315,4655.19 6715,4655.19 U13.13@6765,4705.19 ; v1(7140,4655.19) 7205,4655.19 7255,4705.19 U10.16@7356.2,4705.19
D6: M2.23 M4.23 M6.23 M8.23 U10.14 U11.17 U13.1 | length 7946.3
  Top Layer w10: M2.23@2410.48,3804.99 2630.18,3804.99 2679.98,3755.19 3124.98,3755.19 3174.98,3805.19 M4.23@3394.78,3804.99 ; M4.23@3394.73,3804.99 3614.43,3804.99 3664.23,3755.19 4109.23,3755.19 4159.23,3805.19 M6.23@4379.03,3804.99 ; M6.23@4378.98,3804.99 4598.68,3804.99 4648.48,3755.19 5093.48,3755.19 5143.48,3805.19 M8.23@5363.28,3804.99 ; v1(5005,4805.19) 5095,4805.19 5145,4855.19 5350,4855.19 5420,4855.19 v1(5470,4805.19) ; U13.1@6465,4805.19 6715,4555.19 6810,4555.19 6910,4455.19 7200,4455.19 7250,4505.19 U10.14@7356.2,4505.19 7510,4505.19 7560,4455.19 v1(7860,4455.19)
  Bottom Layer w10: v1(5005,4805.19) 5005,3835.2 5035.2,3804.99 M8.23@5363.3,3804.99 ; v1(5470,4805.19) 5500,4805.19 5525,4780.19 6395,4780.19 6420,4805.19 U13.1@6465,4805.19 ; v1(7860,4455.19) 7860,4785.19 7880,4805.19 U11.17@7946.7,4805.19
D7: M2.25 M4.25 M6.25 M8.25 U10.12 U11.18 U13.2 | length 9306.7
  Top Layer w10: M2.25@2410.48,3604.99 2630.18,3604.99 2679.98,3555.19 3124.98,3555.19 3174.98,3605.19 M4.25@3394.78,3604.99 ; M4.25@3394.73,3604.99 3614.43,3604.99 3664.23,3555.19 4109.23,3555.19 4159.23,3605.19 M6.25@4379.03,3604.99 ; M6.25@4378.98,3604.99 4598.68,3604.99 4648.48,3555.19 5093.48,3555.19 5143.48,3605.19 M8.25@5363.28,3604.99 ; v1(4950,5105.19) 5095,5105.19 5145,5155.19 v1(5670,5155.19) ; U13.2@6465,4705.19 6715,4455.19 6810,4455.19 7010,4255.19 7185,4255.19 7235,4305.19 U10.12@7356.2,4305.19 7470,4305.19 7520,4355.19 7760,4355.19 v1(7825,4420.19)
  Bottom Layer w10: v1(4950,5105.19) 4950,3635.2 4980.2,3604.99 M8.25@5363.3,3604.99 ; v1(5670,5155.19) 5670,4870.19 5705,4835.19 6115,4835.19 6135,4855.19 6520,4855.19 6545,4830.19 6545,4730.19 6520,4705.19 U13.2@6465,4705.19 ; v1(7825,4420.19) 7825,4885.19 7845,4905.19 U11.18@7946.7,4905.19
D8: M1.3 M3.3 M5.3 M7.3 U8.3 U9.3 U12.8 | length 7729
  Top Layer w10: M1.3@1918.38,5804.99 2139.37,5804.99 2189.57,5855.19 2631.45,5855.19 2681.65,5804.99 2902.63,5804.99 3123.62,5804.99 3173.82,5855.19 3615.7,5855.19 3665.9,5804.99 3886.88,5804.99 4107.87,5804.99 4158.07,5855.19 4599.95,5855.19 4650.15,5804.99 M7.3@4871.13,5804.99 ; U8.3@7056.2,6005.19 7195,6005.19 7245,6055.19 7515,6055.19 7565.01,6005.19 U9.3@7646.7,6005.19
  Bottom Layer w10: M7.3@4871.1,5804.99 4815.2,5804.99 4790,5830.19 4790,6075.19 4815,6100.19 6550,6100.19 6585,6065.19 6585,5335.19 6615,5305.19 U12.8@6765,5305.19 6970,5305.19 7005,5340.19 7005,5953.99 U8.3@7056.2,6005.19
D9: M1.6 M3.6 M5.6 M7.6 U8.5 U9.4 U12.9 | length 7747
  Top Layer w10: M1.6@1918.4,5504.99 2140,5505.19 2190,5555.19 2630,5555.19 2680,5505.19 M3.6@2902.6,5504.99 ; M3.6@2902.63,5504.99 3124.23,5505.19 3174.23,5555.19 3614.23,5555.19 3664.23,5505.19 M5.6@3886.83,5504.99 ; M5.6@3886.88,5504.99 4108.48,5505.19 4158.48,5555.19 4598.48,5555.19 4648.48,5505.19 M7.6@4871.08,5504.99 ; v1(6980,5805.19) U8.5@7056.2,5805.19
  Bottom Layer w10: M7.6@4871.1,5504.99 4795,5505.19 4770,5530.19 4770,6095.19 4795,6120.19 6575,6120.19 6605,6090.19 6605,5430.19 6630,5405.19 U12.9@6765,5405.19 6950,5405.19 6980,5435.19 v1(6980,5805.19) ; U8.5@7056.2,5805.19 7210,5805.19 7260,5855.19 7455,5855.19 7504.99,5905.19 U9.4@7646.7,5905.19
D10: M1.10 M3.10 M5.10 M7.10 U8.7 U9.7 U12.10 | length 7833
  Top Layer w10: M1.10@1918.38,5104.99 2139.98,5105.19 2189.98,5155.19 2629.98,5155.19 2679.98,5105.19 M3.10@2902.58,5104.99 ; M3.10@2902.63,5104.99 3124.23,5105.19 3174.23,5155.19 3614.23,5155.19 3664.23,5105.19 M5.10@3886.83,5104.99 ; M5.10@3886.88,5104.99 4108.48,5105.19 4158.48,5155.19 4598.48,5155.19 4648.48,5105.19 M7.10@4871.08,5104.99 ; v1(6955,5605.19) U8.7@7056.2,5605.19 7180,5605.19 7230,5655.19 7455,5655.19 7505.01,5605.19 U9.7@7646.7,5605.19
  Bottom Layer w10: M7.10@4871.1,5104.99 4775.2,5104.99 4750,5130.19 4750,6115.19 4775,6140.19 6595,6140.19 6625,6110.19 6625,5530.19 6650,5505.19 U12.10@6765,5505.19 6935,5505.19 6955,5525.19 v1(6955,5605.19)
D11: M1.13 M3.13 M5.13 M7.13 U8.9 U9.8 U12.11 | length 8107.4
  Top Layer w10: M1.13@1918.38,4804.99 2139.98,4805.19 2189.98,4855.19 2629.98,4855.19 2679.98,4805.19 M3.13@2902.58,4804.99 ; M3.13@2902.63,4804.99 3124.23,4805.19 3174.23,4855.19 3614.23,4855.19 3664.23,4805.19 M5.13@3886.83,4804.99 ; M5.13@3886.88,4804.99 4108.48,4805.19 4158.48,4855.19 4598.48,4855.19 4648.48,4805.19 M7.13@4871.08,4804.99 ; U12.11@6765,5605.19 6820,5605.19 7020,5405.19 U8.9@7056.2,5405.19 7165,5405.19 7215,5455.19 7455,5455.19 7505,5505.19 U9.8@7646.7,5505.19
  Bottom Layer w10: M7.13@4871.1,4804.99 4755,4805.19 4730,4830.19 4730,6135.19 4755,6160.19 6615,6160.19 6645,6130.19 6645,5630.19 6670,5605.19 U12.11@6765,5605.19
D12: M1.16 M3.16 M5.16 M7.16 U8.18 U9.13 U12.12 | length 9448.8
  Top Layer w10: M1.16@1918.38,4504.99 2139.98,4505.19 2189.98,4555.19 2629.98,4555.19 2679.98,4505.19 M3.16@2902.58,4504.99 ; M3.16@2902.63,4504.99 3124.23,4505.19 3174.23,4555.19 3614.23,4555.19 3664.23,4505.19 M5.16@3886.83,4504.99 ; M5.16@3886.88,4504.99 4108.48,4505.19 4158.48,4555.19 4598.48,4555.19 4648.48,4505.19 M7.16@4871.08,4504.99 ; U12.12@6765,5705.19 6715,5705.19 6680,5740.19 6680,5800.19 6735,5855.19 6870,5855.19 6970,5955.19 7195,5955.19 7245,6005.19 U8.18@7356.2,6005.19 7515,6005.19 7565,5955.19 v1(7770,5955.19)
  Bottom Layer w10: M7.16@4871.1,4504.99 4730,4505.19 4710,4525.19 4710,6155.19 4735,6180.19 6635,6180.19 6665,6150.19 6665,5730.19 6690,5705.19 U12.12@6765,5705.19 ; v1(7770,5955.19) 7765,5950.19 7765,5475.19 7805,5435.19 7835,5435.19 7905,5505.19 U9.13@7946.7,5505.19
D13: M1.20 M3.20 M5.20 M7.20 U8.16 U9.14 U12.13 | length 9064.5
  Top Layer w10: M1.20@1918.38,4104.99 2139.98,4105.19 2189.98,4155.19 2629.98,4155.19 2679.98,4105.19 M3.20@2902.58,4104.99 ; M3.20@2902.63,4104.99 3124.23,4105.19 3174.23,4155.19 3614.23,4155.19 3664.23,4105.19 M5.20@3886.83,4104.99 ; M5.20@3886.88,4104.99 4108.48,4105.19 4158.48,4155.19 4598.48,4155.19 4648.48,4105.19 M7.20@4871.08,4104.99 ; U12.13@6765,5805.19 6895,5805.19 6945,5755.19 v1(7125,5755.19) ; U8.16@7356.2,5805.19 7415,5805.19 7565,5655.19 7800,5655.19 7850,5605.19 U9.14@7946.7,5605.19
  Bottom Layer w10: M7.20@4871.1,4104.99 4715,4105.19 4690,4130.19 4690,6175.19 4715,6200.19 6650,6200.19 6685,6165.19 6685,5830.19 6710,5805.19 U12.13@6765,5805.19 ; v1(7125,5755.19) 7210,5755.19 7260,5805.19 U8.16@7356.2,5805.19
D14: M1.23 M3.23 M5.23 M7.23 U8.14 U9.17 U12.1 | length 9791.3
  Top Layer w10: M1.23@1918.38,3804.99 2139.98,3805.19 2189.98,3855.19 2629.98,3855.19 2679.98,3805.19 M3.23@2902.58,3804.99 ; M3.23@2902.63,3804.99 3124.23,3805.19 3174.23,3855.19 3614.23,3855.19 3664.23,3805.19 M5.23@3886.83,3804.99 ; M5.23@3886.88,3804.99 4108.48,3805.19 4158.48,3855.19 4598.48,3855.19 4648.48,3805.19 M7.23@4871.08,3804.99 ; v1(6465,6230.19) U12.1@6465,5905.19 6715,5655.19 6820,5655.19 6920,5555.19 7180,5555.19 7230,5605.19 U8.14@7356.2,5605.19 7455,5605.19 7505,5555.19 7670,5555.19 v1(7870,5555.19)
  Bottom Layer w10: M7.23@4871.1,3804.99 4695.2,3804.99 4670,3830.2 4670,6195.19 4695,6220.19 6455,6220.19 v1(6465,6230.19) ; v1(7870,5555.19) 7870,5880.19 7895,5905.19 U9.17@7946.7,5905.19
D15: M1.25 M3.25 M5.25 M7.25 U8.12 U9.18 U12.2 | length 10375.9
  Top Layer w10: M1.25@1918.38,3604.99 2139.98,3605.19 2189.98,3655.19 2629.98,3655.19 2679.98,3605.19 M3.25@2902.58,3604.99 ; M3.25@2902.63,3604.99 3124.23,3605.19 3174.23,3655.19 3614.23,3655.19 3664.23,3605.19 M5.25@3886.83,3604.99 ; M5.25@3886.88,3604.99 4108.48,3605.19 4158.48,3655.19 4598.48,3655.19 4648.48,3605.19 M7.25@4871.08,3604.99 ; v1(6410,6255.19) 6410,5860.19 U12.2@6465,5805.19 6715,5555.19 6820,5555.19 7020,5355.19 7120,5355.19 7165,5355.19 7215,5405.19 U8.12@7356.2,5405.19 7455,5405.19 7505,5455.19 7760,5455.19 7820,5455.19 7840,5475.19 v1(7840,5505.19)
  Bottom Layer w10: M7.25@4871.1,3604.99 4670.2,3604.99 4650,3625.2 4650,6215.19 4675,6240.19 6395,6240.19 v1(6410,6255.19) ; v1(7840,5505.19) 7840,5975.19 7870,6005.19 U9.18@7946.7,6005.19
G1_1: CN1.6 G1.1 G3.5 G11.5 | length 10972
  Top Layer w10: CN1.6@8389.99,1705.19 8390,1870.19 8340,1920.19 8340,2320.2 8385,2365.2 11795,2365.2 11820,2390.2 11820,4790.19 v1(11835,4805.19) ; G3.5@10132.43,4305.2 10210,4305.19 10225,4320.19 10225,4840.19 10250,4865.19 11555,4865.19 11585,4865.19 v1(11645,4805.19)
  Bottom Layer w10: G1.1@9541.2,4705.19 9650,4705.19 9700,4655.19 10580,4655.19 10615,4620.19 10615,4340.19 10650,4305.19 G11.5@10722.3,4305.19 10672.3,4255.19 10215,4255.19 10182.42,4255.19 G3.5@10132.43,4305.2 ; v1(11645,4805.19) v1(11835,4805.19)
G1_11: G1.11 U1.13 U1.14 | length 1443.7
  Top Layer w10: G1.11@9841.2,4405.19 9965,4405.19 9990,4380.19 9990,4285.19 9990,3785.2 10020,3755.2 v1(10255,3755.2) ; U1.13@10431.81,3505.23 U1.14@10431.81,3605.23
  Bottom Layer w10: v1(10255,3755.2) 10255,3630.2 10279.96,3605.23 U1.14@10431.81,3605.23
G1_12: G1.12 G3.4 | length 332.7
  Top Layer w10: G1.12@9841.2,4505.19 9960,4505.19 10060.01,4405.19 G3.4@10132.43,4405.2
G1_13: G1.13 G3.1 | length 332.6
  Top Layer w10: G1.13@9841.2,4605.19 9960,4605.19 10059.99,4705.19 G3.1@10132.43,4705.2
G2_4: CN1.49 G2.4 G2.10 G4.6 pad.@6190,1957.75 | length 6826.6
  Top Layer w10: pad.@6190,1957.75 6190,2850.2 6215,2875.2 8645,2875.2 8670,2900.2 8670,2950.2 8695,2975.2 v1(9950,2975.2) ; G2.4@9541.8,3505.2 9655,3505.2 9755,3405.2 G2.10@9841.8,3405.2 9995,3405.2 10045,3355.2 10565,3355.2 10615,3305.2 G4.6@10722.3,3305.2
  Bottom Layer w10: CN1.49@6189.99,1705.19 pad.@6190,1957.75 ; G2.10@9841.8,3405.2 9960,3405.2 9990,3375.2 9990,3015.2 v1(9950,2975.2)
G2_13: CN1.47 G2.13 pad.7 | length 5823.8
  Top Layer w10: pad.7@6290,1960.19 6290,2005.19 6290,2605.2 6325,2640.2 v1(9920,2640.2)
  Bottom Layer w10: CN1.47@6289.99,1705.19 pad.7@6290,1960.19 ; G2.13@9841.8,3705.2 9975,3705.2 10010,3670.2 10010,2705.2 10010,2680.2 9995,2665.2 9945,2665.2 v1(9920,2640.2)
G3_10: G3.10 G4.4 U1.15 | length 1128.3
  Top Layer w10: U1.15@10431.81,3705.23 10365,3705.2 10340,3730.2 10340,3774.49 10340,4280.19 10365,4305.19 G3.10@10432.43,4305.2 ; U1.15@10431.81,3705.23 10531.85,3605.2 10545,3605.2 10622.3,3605.2 G4.4@10722.3,3505.2
G3_13: G3.13 U1.12 | length 1567.4
  Top Layer w10: v1(10225,3805.2) 10270,3805.2 10300,3835.2 10300,4575.2 10330,4605.19 G3.13@10432.43,4605.2
  Bottom Layer w10: v1(10225,3805.2) 10225,3425.2 10244.96,3405.23 U1.12@10431.81,3405.23
G4_8: G4.8
G4_9: G4.9
G4_10: G4.10
G5_1: CN1.45 G1.2 G1.4 G5.1 G5.4 G5.10 pad.9 | length 8836.1
  Top Layer w10: pad.9@6390,1957.75 6390,1998.89 6390,2560.2 6420,2590.2 v1(10025,2590.2) ; G5.1@8951.33,4698.31 8953.22,4700.19 9055,4700.19 9110,4645.19 9345,4645.19 9385,4605.19 G1.2@9541.2,4605.19 9605,4541.4 9605,4500.19 9605,4468.99 G1.4@9541.2,4405.19
  Bottom Layer w10: CN1.45@6389.99,1705.19 pad.9@6390,1957.75 ; G5.4@8951.33,4398.31 8916.9,4398.3 8885,4430.19 8885,4520.19 8915,4550.19 8990,4550.19 9020,4580.19 9020,4629.6 G5.1@8951.33,4698.31 ; G5.4@8951.33,4398.31 8953.22,4400.19 9115,4400.19 9216.89,4298.31 G5.10@9251.33,4298.31 ; G5.10@9251.33,4298.31 9254.4,4295.19 9390,4295.19 9435,4250.19 9435,4085.2 9480,4040.2 9600,4040.2 10000,4040.2 10050,3990.2 10050,3780.2 10075,3755.2 10155,3755.2 10180,3730.2 10180,3685.2 10150,3655.2 10075,3655.2 10050,3630.2 10050,2615.2 v1(10025,2590.2)
G5_2: G5.2 U3.3 | length 1231.7
  Bottom Layer w10: U3.3@8950.61,3605.23 8995,3605.2 9020,3630.2 9020,3975.2 8995,4000.2 8900,4000.2 8865,4035.2 8865,4560.19 8903.1,4598.3 G5.2@8951.33,4598.31
G5_5: G5.5 U3.13 | length 1043.7
  Bottom Layer w10: G5.5@8951.33,4298.31 9041.9,4298.3 9080,4260.19 9080,3550.2 9125,3505.2 U3.13@9250.61,3505.23
G5_6: G2.5 G5.6 | length 1585.1
  Bottom Layer w10: G5.6@8951.33,4198.31 9001.9,4198.3 9040,4160.19 9040,3300.2 9085,3255.2 9335,3255.2 9380,3300.2 9380,3365.2 9420,3405.2 G2.5@9541.8,3405.2
G5_8: G2.9 G5.8 | length 1505.7
  Bottom Layer w10: G5.8@9251.33,4098.31 9123.1,4098.3 9100,4075.2 9100,3590.2 9135,3555.2 9345,3555.2 9445,3455.2 9600,3455.2 9750,3305.2 G2.9@9841.8,3305.2
G5_9: G5.9 U3.11 | length 1339.1
  Top Layer w10: v1(9045,4245.19) 9090,4200.19 9115,4200.19 9249.44,4200.19 G5.9@9251.33,4198.31
  Bottom Layer w10: v1(9045,4245.19) 9060,4230.19 9060,3345.2 9100,3305.2 U3.11@9250.61,3305.23
G5_13: CN1.39 G1.10 G5.13 RP1.1 | length 11173.7
  Top Layer w10: v1(6690,2195.2) 6690,2400.2 6735,2445.2 6795,2445.2 11540,2445.2 11565,2470.2 11565,4655.19 11560,4660.19 11515,4705.19 RP1.1@11312.91,4705.23 ; v1(10800,4655.19) 11160,4655.19 11210.04,4705.23 RP1.1@11312.91,4705.23
  Bottom Layer w10: CN1.39@6689.99,1705.19 v1(6690,2195.2) ; G5.13@9251.33,4598.31 9355,4700.19 9355,4815.19 9385,4845.19 9435,4845.19 10595,4845.19 10625,4815.19 10625,4690.19 10660,4655.19 v1(10800,4655.19) ; G5.13@9251.33,4598.31 9254.44,4595.19 9375,4595.19 9415,4555.19 9595,4555.19 9841.2,4308.99 G1.10@9841.2,4305.19
G6_5: CN1.5 G1.5 G3.3 G6.5 pad.33 | length 10476.2
  Top Layer w10: pad.33@8390,1957.75 8390,2295.2 8440,2345.2 11770,2345.2 11815,2345.2 11840,2370.2 11840,4707.3 11836.1,4711.3 11840,4715.19 11840,4745.19 11880,4785.19 v1(11880,4945.19) ; G1.5@9541.2,4305.19 9605,4305.19 9635,4335.19 v1(9635,4582.93) 9635,5280.19 9610,5305.19 G6.5@9541.83,5305.2 ; G3.3@10132.43,4505.2 10190,4505.19 10205,4520.19 10205,4850.19 10240,4885.19 11430,4885.19 11585,4885.19 v1(11645,4945.19)
  Bottom Layer w10: CN1.5@8389.99,1705.19 pad.33@8390,1957.75 ; v1(9635,4582.93) 9662.7,4555.19 9945,4555.19 10001.9,4498.3 G3.3@10132.4,4498.3 ; v1(11645,4945.19) v1(11880,4945.19)
G6_6: G4.1 G6.6 | length 3297.9
  Bottom Layer w10: G6.6@9541.83,5205.2 9665,5205.19 9690,5180.19 9690,5145.19 9690,4930.19 9735,4885.19 10847.3,4885.19 10880,4852.49 10880,4090.2 10920,4050.2 11070,4050.2 11105,4015.2 11105,3780.2 11080,3755.2 10815,3755.2 10772.3,3755.2 G4.1@10722.3,3805.2
G6_9: G6.9 G11.8 | length 2465
  Bottom Layer w10: G6.9@9841.83,5205.2 9760,5205.19 9735,5205.19 9710,5180.19 9710,4935.19 9740,4905.19 10850,4905.19 10900,4855.19 10900,4135.19 10930,4105.19 G11.8@11022.3,4105.19
G6_10: G1.8 G6.10 | length 1353.7
  Top Layer w10: G1.8@9841.2,4105.19 9775,4105.19 9750,4130.19 9750,5280.19 9775,5305.19 G6.10@9841.83,5305.2
G6_11: G5.11 G6.11 | length 1897.9
  Bottom Layer w10: G5.11@9251.33,4398.31 9135,4514.6 9135,4840.19 9175,4880.19 9355,4880.19 9395,4920.19 9395,5505.19 9445,5555.19 9525,5555.19 9585,5555.19 9735,5405.19 G6.11@9841.83,5405.2